# Altium PCB REV04.PcbDoc
Units mm, origin at the board's own origin, x right, y up, seen from the top; angles counter-clockwise.
Board outline 24.5 x 19 mm, 2 copper layers (Top Layer, Bottom Layer), stack 1.57 mm thick; 8 components, 4 nets, 14 pads, 4 vias.
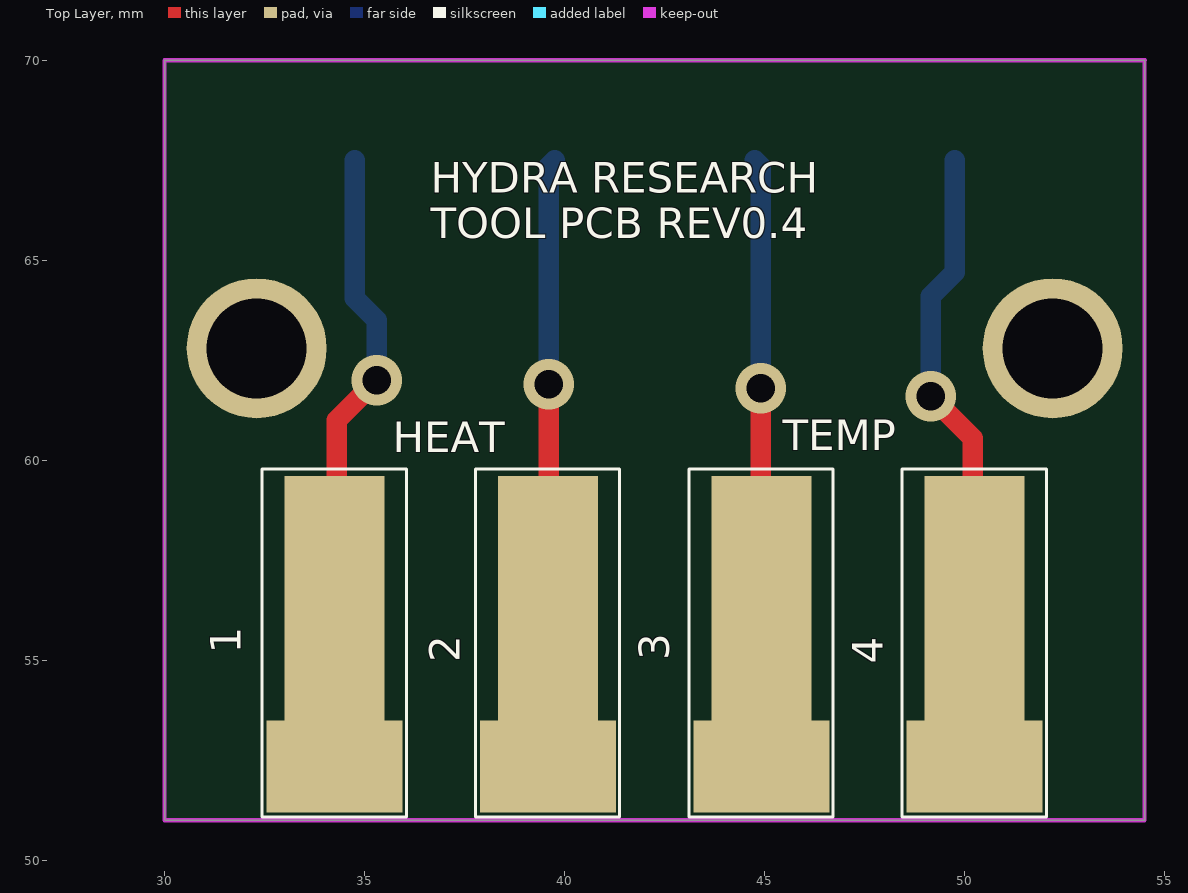
[diagram p0: Top Layer view]
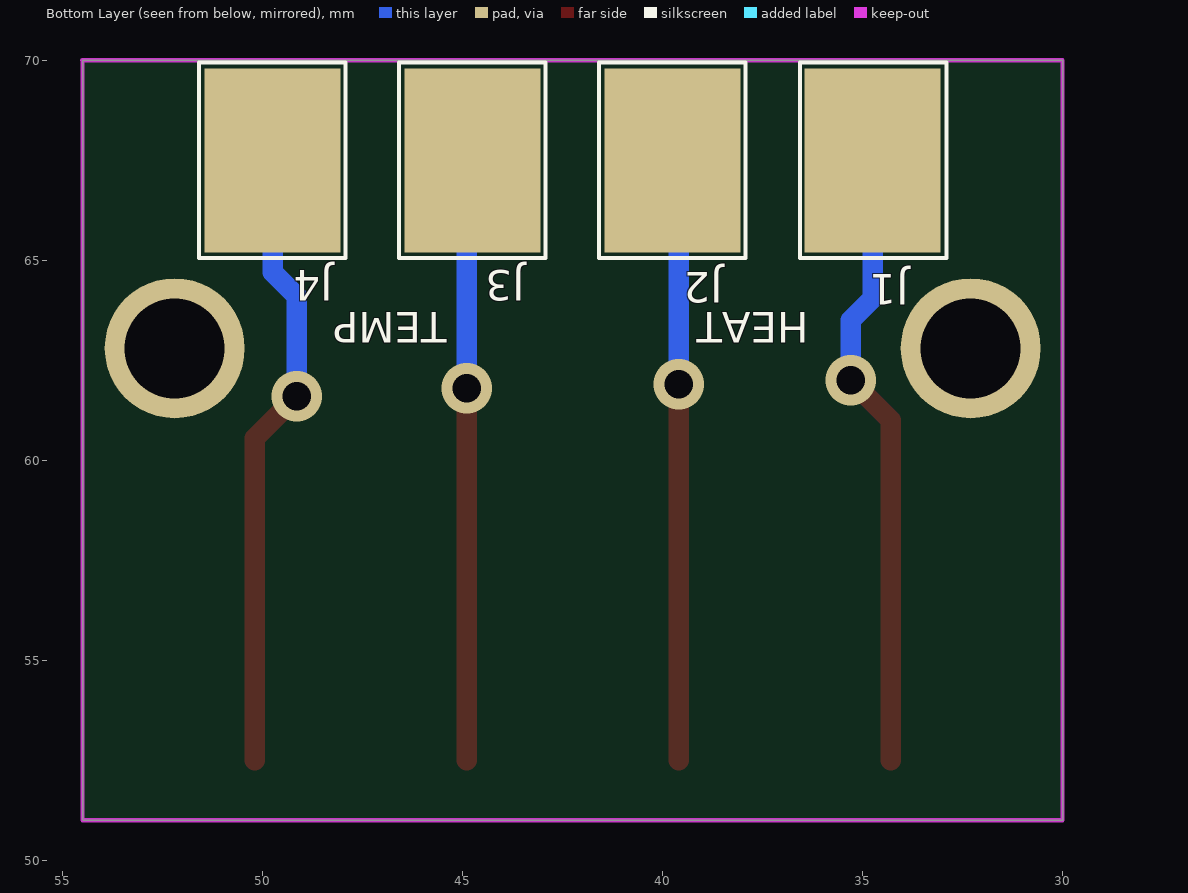
[diagram p1: Bottom Layer view, seen from below]
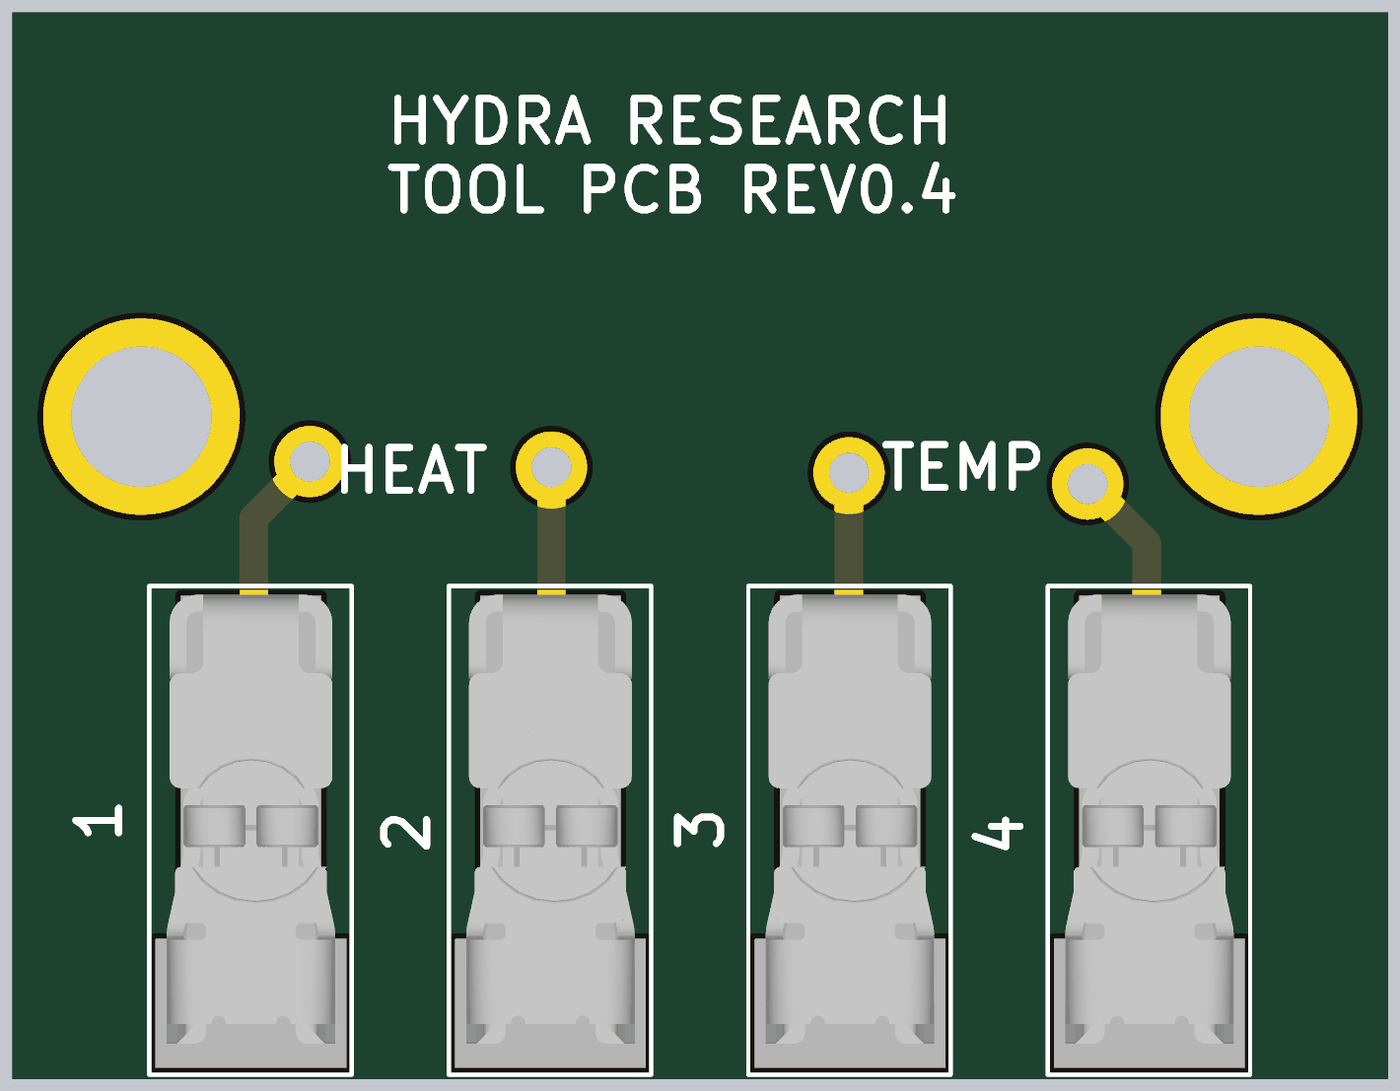
[diagram p2: 3D render of the assembled board from above, using the file's embedded part models]

## Layer stack, top to bottom
Top Solder: solder mask 0.01, Solder Resist, Dk 3.5
Top Layer: signal copper 0.035
Dielectric 1: dielectric 1.5, FR-4, Dk 4.8
Bottom Layer: signal copper 0.035
Bottom Solder: solder mask 0.01, Solder Resist, Dk 3.5

## Board outline
30,51 30,70 54.501,70 54.501,51

## Design rules (kind name [scope] priority, off if disabled: settings)
Clearance [All] p1: gap=0.1 ignorepadtopadclearanceinfootprint=FALSE
PolygonConnect [All] p1: connectstyle=Relief reliefconductorwidth=0.254 reliefentries=4 polygonreliefangle="90 Angle" airgapwidth=0.254
RoomDefinition REV04 [InComponentClass('REV04')] p1: confinementstyle=ConfineIn formatcopy=TRUE lockcomponents=FALSE outline 12.319,37.973 76.581,37.973 76.581,78.867 12.319,78.867
RoutingVias [All] p1: holewidth=0.711 width=1.27 viastyle="Through Hole" minholewidth=0.711 minwidth=1.27 maxholewidth=0.711 maxwidth=1.27
SolderMaskExpansion [All] p1: expansion=0.102
Width [All] p1: maxlimit=0.762 minlimit=0.254 preferedwidth=0.254
30 further rules are at their usual default settings.

## Components (designator, comment, footprint, x,y, rotation, side; value= is the part's Value field where it differs from the comment)
1 "WM17990CT" WM17990CT-ND-L 31.75,47.58 r0 top
2 "WM17990CT" WM17990CT-ND-L 37.083,47.58 r0 top
3 "WM17990CT" WM17990CT-ND-L 42.417,47.58 r0 top
4 "WM17990CT" WM17990CT-ND-L 47.75,47.58 r0 top
J1 "CONTACT" "CONTRACT PAD" 34.75,67.5 r0 bottom
J2 "CONTACT" "CONTRACT PAD" 39.75,67.5 r180 bottom
J3 "CONTACT" "CONTRACT PAD" 44.75,67.5 r180 bottom
J4 "CONTACT" "CONTRACT PAD" 49.75,67.5 r180 bottom

## Footprints (in the part's own frame and the unit in brackets; to place one, negate y for a bottom-side part, rotate by r counter-clockwise, add the part's x,y. Pads: shape width x height; smd on the part's side, far side on the other; paste and mask are expansions set on the pad)
"CONTRACT PAD" [mm]
  rect 3.4x4.6 smd: 1(0,0)
  silkscreen extent -1.85,-2.44 1.82,2.44
WM17990CT-ND-L [mm]
  rect 3.4x2.3 smd mask+0.1: 1(2.5,4.77)
  rect 2.5x8.4 smd mask+0.1: 1(2.5,7.831)
  Top Layer region: -3.81,6.731
  Top Layer region: 0.318,9.449
  silkscreen extent 0.69,3.5 4.29,12.2, body extent 1,4.05 4,12.05, height 2.9

## Free pads (board coordinates)
  round 3.5 hole 2.5: 2(32.3,62.8) 2(52.2,62.8)

## Via types
v1: diameter 1.27, hole 0.711, Top Layer to Bottom Layer, 4 vias

## Nets (pads, with @x,y where several pads share a name; then routed paths per layer and width w, separated by ;. In a path a pad name is that pad's centre, name@x,y a point inside that pad or via, vN(x,y) a via of type N, cw(c..) or ccw(c..) an arc to the next point about the centre after c; other vN are vias at no path point)
Net1_1: 1.1 J1.1 | length 15.6
  Top Layer w0.508: 1.1@34.3,52.494 34.3,61 v1(35.3,62)
  Bottom Layer w0.508: J1.1 34.75,64.05 35.3,63.5 v1(35.3,62)
Net2_1: 2.1 J2.1 | length 15.1
  Top Layer w0.508: 2.1@39.6,52.5 39.6,55.606 v1(39.6,61.9)
  Bottom Layer w0.508: v1(39.6,61.9) 39.6,67.35 J2.1
Net3_1: 3.1 J3.1 | length 15.1
  Top Layer w0.508: 3.1@44.9,52.5 44.9,55.606 v1(44.9,61.8)
  Bottom Layer w0.508: J3.1 44.9,67.35 v1(44.9,61.8)
Net4_1: 4.1 J4.1 | length 15.7
  Top Layer w0.508: v1(49.15,61.6) 50.2,60.55 50.2,55.6 4.1@50.2,52.494
  Bottom Layer w0.508: v1(49.15,61.6) 49.15,64.1 49.75,64.7 J4.1

## Keep-outs
Keep-Out Layer:
  the board outline again, w0.102

## Silkscreen, mask and mechanical layers (free items; w line width, h text height)
Top Overlay:
  text "HYDRA RESEARCH / TOOL PCB REV0.4" at 36.65,65.55 h0.76
  text "TEMP" at 45.45,60.25 h0.76
  text "HEAT" at 35.7,60.2 h0.76
Bottom Overlay:
  text "HEAT" at 36.35,63.7 h0.76 r180
  text "TEMP" at 45.4,63.7 h0.76 r180
Drill Drawing:
  drawing of 213 lines, arcs and shapes, not listed
  text "Symbol" at 31.587,94.724 h1.83
  text "Count" at 44.436,94.724 h1.83
  text "Hole Size" at 56.625,94.724 h1.83
  text "Plated" at 84.557,94.724 h1.83
  text "Hole Type" at 97.406,94.724 h1.83
  text "Drill Layer Pair" at 116.044,94.724 h1.83
  text "Via/Pad" at 154.133,94.724 h1.83
  text "Pad Shape" at 169.115,94.724 h1.83
  text "Template" at 188.058,94.724 h1.83
  text "Description" at 204.564,94.724 h1.83
  text "Hole Tolerance (+)" at 226.25,94.724 h1.83
  text "Hole Tolerance (-)" at 260.123,94.724 h1.83
  text "2" at 44.436,90.914 h1.52
  text "98.43mil (2.500mm)" at 56.625,90.914 h1.52
  text "PTH" at 84.557,90.914 h1.52
  text "Round" at 97.406,90.914 h1.52
  text "Top Layer - Bottom Layer" at 116.044,90.914 h1.52
  text "Pad" at 154.133,90.914 h1.52
  text "Rounded" at 169.115,90.914 h1.52
  text "c350h250" at 188.058,90.914 h1.52
  text "4" at 44.436,87.104 h1.52
  text "28.00mil (0.711mm)" at 56.625,87.104 h1.52
  text "PTH" at 84.557,87.104 h1.52
  text "Round" at 97.406,87.104 h1.52
  text "Top Layer - Bottom Layer" at 116.044,87.104 h1.52
  text "Via" at 154.133,87.104 h1.52
  text "Rounded" at 169.115,87.104 h1.52
  text "v127h71" at 188.058,87.104 h1.52
  text "6 Total" at 44.436,83.294 h1.52
  text "Layer" at 63.665,76.218 h1.52
  text "Name" at 74.076,76.218 h1.52
  text "Material" at 97.692,76.218 h1.52
  text "Thickness" at 119.53,76.218 h1.52
  text "Constant" at 136.036,76.218 h1.52
  text "Board Layer Stack" at 150.51,76.218 h1.52
  text "1" at 63.665,73.17 h1.52
  text "Top Overlay" at 74.076,73.17 h1.52
  text "2" at 63.665,70.122 h1.52
  text "Top Solder" at 74.076,70.122 h1.52
  text "Solder Resist" at 97.692,70.122 h1.52
  text "0.39mil" at 119.53,70.122 h1.52
  text "3.5" at 136.036,70.122 h1.52
  text "3" at 63.665,67.074 h1.52
  text "Top Layer" at 74.076,67.074 h1.52
  text "Copper" at 97.692,67.074 h1.52
  text "1.38mil" at 119.53,67.074 h1.52
  text "4" at 63.665,64.026 h1.52
  text "Dielectric 1" at 74.076,64.026 h1.52
  text "FR-4" at 97.692,64.026 h1.52
  text "59.06mil" at 119.53,64.026 h1.52
  text "4.8" at 136.036,64.026 h1.52
  text "5" at 63.665,60.978 h1.52
  text "Bottom Layer" at 74.076,60.978 h1.52
  text "Copper" at 97.692,60.978 h1.52
  text "1.38mil" at 119.53,60.978 h1.52
  text "6" at 63.665,57.93 h1.52
  text "Bottom Solder" at 74.076,57.93 h1.52
  text "Solder Resist" at 97.692,57.93 h1.52
  text "0.39mil" at 119.53,57.93 h1.52
  text "3.5" at 136.036,57.93 h1.52
  text "7" at 63.665,54.882 h1.52
  text "Bottom Overlay" at 74.076,54.882 h1.52

## Dimensions
30,51 to 54.5,51 on Drill Drawing
52.2,62.8 to 54.5,70 on Drill Drawing
30,70 to 33.05,68.8 on Drill Drawing
30,51 to 32.55,51.35 on Drill Drawing
29.695,70 to 32.3,62.8 on Drill Drawing
32.3,62.8 to 52.2,62.8 on Drill Drawing